# Altium PCB BlindController.PcbDoc
Units mil, origin at the board's own origin, x right, y up, seen from the top; angles counter-clockwise.
Board outline 6000 x 4000 mil, 2 copper layers (Top Layer, Bottom Layer); 65 components, 46 nets, 204 pads, 20 vias.
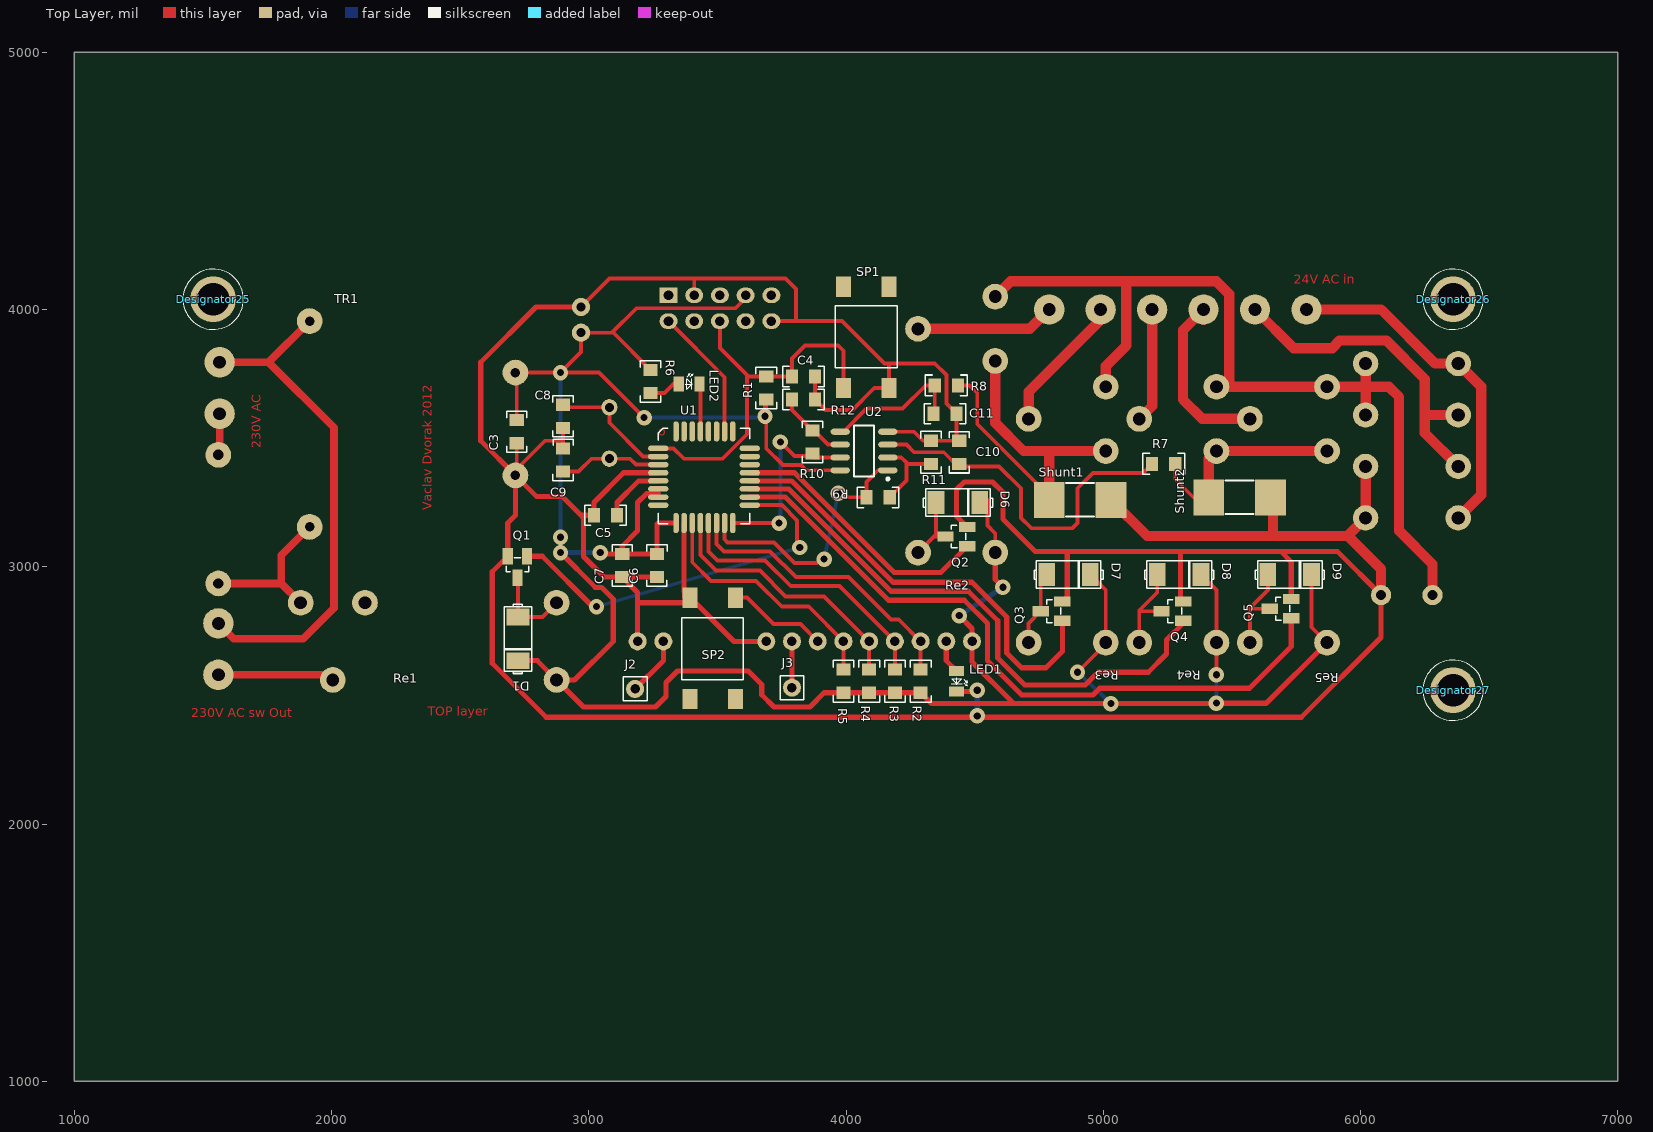
[diagram p0: Top Layer view]
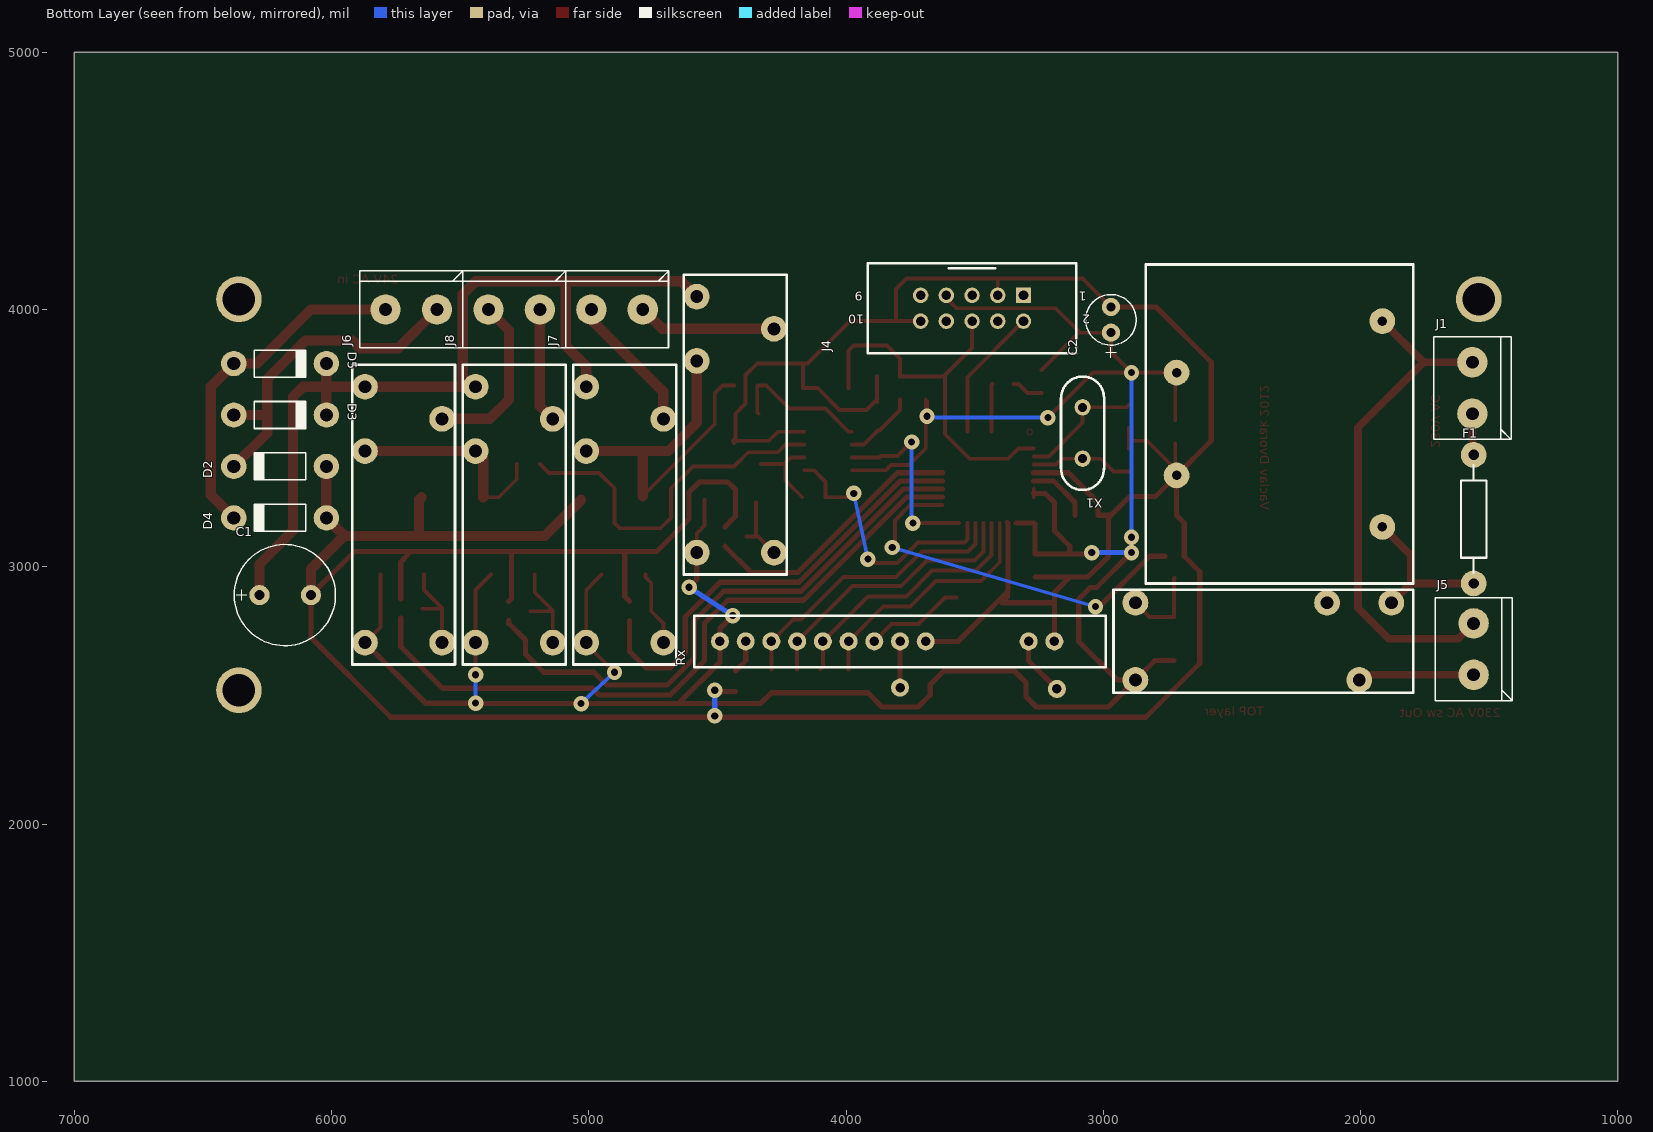
[diagram p1: Bottom Layer view, seen from below]

## Layer stack, top to bottom
Top Layer: signal copper 1.4
Dielectric: dielectric 12.6, FR-4, Dk 4.8
Bottom Layer: signal copper 1.4

## Board outline
1000,1000 7000,1000 7000,5000 1000,5000

## Design rules (kind name [scope] priority, off if disabled: settings)
Clearance [All] p1: gap=8
ComponentClearance [All] p1 off: gap=10 collisioncheckmode=3 verticalgap=10 showdistances=FALSE
PolygonConnect [All] p1: connectstyle=Relief reliefconductorwidth=10 reliefentries=4 polygonreliefangle="90 Angle"
RoutingVias [All] p1: holewidth=28 width=50 viastyle="Through Hole" minholewidth=28 minwidth=50 maxholewidth=28 maxwidth=50
SilkscreenOverComponentPads [All] p1: minsilkscreentomaskgap=10
SolderMaskExpansion [All] p1: expansion=4
Width [All] p1: maxlimit=40 minlimit=10 preferedwidth=15 minimp=50.000000 maximp=50.000000 favimp=50.000000
26 further rules are at their usual default settings.

## Components (designator, comment, footprint, x,y, rotation, side; value= is the part's Value field where it differs from the comment)
C1 "2.2mF/35 V" EL_10X13 6280,2890 r180 bottom
C2 "C_EL" EL_5x11 2970,3910 r90 bottom
C3 "C" C0805 2720,3480 r90 top
C4 "" C0805 3880,3740 r180 top
C5 "C" C0805 3020,3200 r0 top
C6 "C" C0805 3265,2960 r90 top
C7 "C" C0805 3130,2960 r90 top
C8 "C" C0805 2900,3540 r90 top
C9 "C" C0805 2900,3460 r270 top
C10 "C" C0805 4440,3490 r270 top
C11 "C" C0805 4430,3595 r180 top
D1 "D" SMA 2725,2755 r270 top
D2 "D" DO41 6020,3390 r0 bottom
D3 "D" DO41 6380,3590 r180 bottom
D4 "D" DO41 6020,3190 r0 bottom
D5 "D" DO41 6380,3790 r180 bottom
D6 "D" SMA 4400,3250 r0 top
D7 "D" SMA 4830,2970 r0 top
D8 "D" SMA 5260,2970 r0 top
D9 "D" SMA 5690,2970 r0 top
Designator25 "Comment" Sloupek 1540,4040 r0 top
Designator26 "Comment" Sloupek 6360,4040 r0 top
Designator27 "Comment" Sloupek 6360,2520 r0 top
F1 "Fuse" AXIAL-0.5L 1560,3185 r90 bottom
J1 "230V AC" ARK_2 1565,3595 r90 bottom
J2 "Antenna" PIN 3180,2525 r0 top
J3 "TP1" PIN 3790,2530 r0 top
J4 "ICC/SWIM (MLW10)" MLW10 3310,4055 r0 bottom
J5 "230V AC to Trans Primary" ARK_2 1560,2580 r90 bottom
J6 "24V AC Trans Sec." ARK_2 5590,4000 r0 bottom
J7 "Mot1 24V DC" ARK_2 4790,4000 r0 bottom
J8 "Mot2 24V DC" ARK_2 5190,4000 r0 bottom
LED1 "LED" LED_SMD 4430,2595 r270 top
LED2 "LED" LED_SMD 3350,3710 r0 top
Q1 "BSS138" SOT23 2760,3040 r180 top
Q2 "BSS138" SOT23 4470,3080 r90 top
Q3 "BSS138" SOT23 4840,2790 r90 top
Q4 "BSS138" SOT23 5310,2790 r90 top
Q5 "BSS138" SOT23 5730,2800 r90 top
R1 "" R0805 3690,3650 r90 top
R2 "R" R0805 4290,2510 r90 top
R3 "R" R0805 4190,2510 r90 top
R4 "R" R0805 4090,2510 r90 top
R5 "R" R0805 3990,2510 r90 top
R6 "R" R0805 3240,3765 r270 top
R7 "R" R0805 5280,3400 r180 top
R8 "R" R0805 4435,3705 r180 top
R9 "R" R0805 4080,3270 r0 top
R10 "R" R0805 3870,3440 r90 top
R11 "R" R0805 4330,3400 r90 top
R12 "R" R0805 3790,3650 r0 top
Re1 "SPDT" RELE_JS-K 1880,2860 r0 top
Re2 "SPDT" RELE_JS-K 4580,4050 r270 top
Re3 "SPDT" RELE_JS-K 5010,3700 r270 top
Re4 "SPDT" RELE_JS-K 5440,3700 r270 top
Re5 "SPDT" RELE_JS-K 5870,3700 r270 top
Rx "MX-4MHCS" RX-4MHCS 3190,2710 r0 bottom
Shunt1 "1R0" "R Shunt S-2" 4910,3260 r180 top
Shunt2 "1R0" "R Shunt S-2" 5530,3270 r180 top
SP1 "SP" DIP_PUSH_BUTTON 3990,3695 r90 top
SP2 "SP" DIP_PUSH_BUTTON 3570,2880 r270 top
TR1 "MYRRA 47152" MYRRA47000 1915,3155 r90 top
U1 "STM8AF61x6T" QFP32 3270,3460 r0 top
U2 "TS922" SO8_L 4070,3450 r180 top
X1 "" HC-49U 3080,3620 r270 bottom

## Footprints (in the part's own frame and the unit in brackets; to place one, negate y for a bottom-side part, rotate by r counter-clockwise, add the part's x,y. Pads: shape width x height; smd on the part's side, far side on the other; paste and mask are expansions set on the pad)
ARK_2 [mm]
  round 3 hole 1.27: 1(0,0) 2(5.08,0)
  silkscreen extent -2.54,-3.82 7.62,3.8
AXIAL-0.5L [mil] "Semiconductor Resistor; 2 Leads"
  round 100 hole 40: 1(-250,0) 2(250,0)
  silkscreen extent -210,-50 210,50
C0805 [mm]
  rect 1.2x1.4 smd: 1(0,0) 2(2.286,0)
  silkscreen extent -0.9,-1 3.19,1
DIP_PUSH_BUTTON [mm]
  rect 2x1.5 smd: 1(0,0) 2(0,-4.496) 3(10.008,-4.496) 4(10.008,0)
  silkscreen extent 2.01,-5.31 8.1,0.79
DO41 [mm]
  round 2.5 hole 1.3: 1(0,0) 2(9.144,0)
  silkscreen extent 2.03,-1.33 7.11,1.33
EL_5x11 [mm]
  round 1.8 hole 0.9: 1(0,0) 2(2.54,0)
  silkscreen extent -2.48,-2.5 3.77,2.5
EL_10X13 [mm]
  round 2 hole 1: 1(0,0) 2(5.08,0)
  silkscreen extent -2.5,-5 7.5,5
HC-49U [mil]
  round 63 hole 35: 1(0,0) 2(200,0)
  silkscreen extent -119,-84 321,83
LED_SMD [mm]
  rect 1x1.5 smd: 1(0,0) 2(2.032,0)
  silkscreen extent 0.66,-0.51 1.45,1.05
MLW10 [mil] "Header, STRT 10WAY - MLW10"
  rect 60x60 / inner rect 60x60 / far side rect 70x60 hole 37: 1(0,0)
  round 60 / inner round 60 / far side oval 70x60 hole 37: 2(0,100) 3(100,0) 4(100,100) 5(200,0) 6(200,100) 7(300,0) 8(300,100) 9(400,0) 10(400,100)
  silkscreen extent -205,-125 605,225
MYRRA47000 [mil] "AC/DC converter Myrra 47000 series"
  round 100 hole 37: 1(0,0) 5(800,0) 7(600,-800) 9(200,-800)
PIN [mil]
  round 70 hole 37: 1(0,0)
  silkscreen extent -46,-46 46,46
QFP32 [mm]
  oval 2x0.55 smd: 1(0,0) 2(0,-0.8) 3(0,-1.6) 4(0,-2.4) 5(0,-3.2) 6(0,-4) 7(0,-4.8) 8(0,-5.6) 17(9.04,-5.6) 18(9.04,-4.8) 19(9.04,-4) 20(9.04,-3.2) 21(9.04,-2.4) 22(9.04,-1.6) 23(9.04,-0.8) 24(9.04,0)
  oval 0.55x2 smd: 9(1.76,-7.36) 10(2.56,-7.36) 11(3.36,-7.36) 12(4.16,-7.36) 13(4.96,-7.36) 14(5.76,-7.36) 15(6.56,-7.36) 16(7.36,-7.36) 25(7.36,1.68) 26(6.56,1.68) 27(5.76,1.68) 28(4.96,1.68) 29(4.16,1.68) 30(3.36,1.68) 31(2.56,1.68) 32(1.76,1.68)
  silkscreen extent 0,-7.44 9.04,2
R0805 [mm]
  rect 1.2x1.4 smd: 1(0,0) 2(2.286,0)
  silkscreen extent -0.93,-1.03 3.2,1.02
"R Shunt S-2" [mil] "Shunt Resistor; Body 6.3 x 3.2 mm (LxW typ)"
  rect 120x140 smd: 1(-120,0) 2(120,0)
  silkscreen extent -55,-65 55,65
RELE_JS-K [mil] "Rele - K contacts configuration"
  round 100 hole 50: 1(0,0) 2(250,0) 3(995,0) 4(995,-300) 5(125,-300)
RX-4MHCS [mil] "433MHz 4 channels receiver"
  round 70 hole 37: 2(0,0) 3(100,0) 7(500,0) 8(600,0) 9(700,0) 10(800,0) 11(900,0) 12(1000,0) 13(1100,0) 14(1200,0) 15(1300,0)
  silkscreen extent -200,-100 1400,100
Sloupek [mm]
  round 4.5 hole 3.2: 1(0,0)
  silkscreen extent -2.98,-2.98 2.98,2.98
SMA [mil]
  rect 65x90 smd: 1(-50,0) 2(120,0)
  silkscreen extent -99,-53 170,53
SO8_L [mm] "SOIC, 8-Leads, Body 4.9x3.9mm, Pitch 1.27mm, IPC High Density"
  oval 1.9x0.6 smd: 1(-2.35,1.905) 2(-2.35,0.635) 3(-2.35,-0.635) 4(-2.35,-1.905) 5(2.35,-1.905) 6(2.35,-0.635) 7(2.35,0.635) 8(2.35,1.905)
  silkscreen extent -2.48,-2.5 1,2.88, body extent -1.95,-2.45 1.95,2.45, height 1.75
SOT23 [mm]
  rect 1x1.6 smd: 1(0,-0.025) 2(1.905,-0.025) 3(0.94,2.108)
  silkscreen extent -0.18,0.13 2.06,1.52

## Part data
C1: library part C_EL_1
C4: library part C
J1 J5 J6 J7 J8: library part CON_2
J2 J3: library part PIN
J4: library part CON_10
Q1 Q2 Q3 Q4 Q5: "N-Channel Enhancement Mode Vertical DMOS FET"
R1 Shunt1 Shunt2: library part R
Re1 Re2 Re3 Re4 Re5: library part Rele_SPDT, "rele SPDT"
Rx: library part RX-4MHCS
TR1: library part MYRRA_AC_DC, "AC/DC  IN:85..260 V AC(DC), OUT: 5V/900mA DC"
U2: library part TS912ID, "Rail-to-Rail CMOS Dual Operational Amplifier"
X1: library part XTALL

## Via types
v1: diameter 60, hole 28, Top Layer to Bottom Layer, 20 vias

## Nets (pads, with @x,y where several pads share a name; then routed paths per layer and width w, separated by ;. In a path a pad name is that pad's centre, name@x,y a point inside that pad or via, vN(x,y) a via of type N, cw(c..) or ccw(c..) an arc to the next point about the centre after c; other vN are vias at no path point)
5V: C2.1 C3.2 C6.2 C7.2 D1.2 D6.2 D7.2 D8.2 D9.2 J4.7 R1.1 R2.1 R3.1 R4.1 R5.1 R6.1 Re1.4 Re2.3 Re3.3 Re4.3 Re5.3 Rx.15 TR1.7 U1.6 U1.7 U1.9 U2.8 | length 11434.2
  Top Layer w15: TR1.7 TR1.7@2720,3755 ; C3.2 TR1.7@2720,3755 ; v1(2890,3055) v1(2890,3115) ; v1(3215,3580) 3040,3755 v1(2890,3755) ; R6.1 3095,3910 3090,3910 ; U1.7 3270,3285 U1.6 ; J4.7 3610,4045 3570,4005 3185,4005 3090,3910 ; v1(3685,3585) 3685,3645 R1.1 3690,3460 3755,3395 3825,3395 3845,3375 U2.8 ; D6.2@4550,3260 4550,3160 4580,3130 Re2.3 ; v1(4900,2590) 5010,2700 Re3.3 5010,2910 D7.2 ; D8.2 5440,2910 Re4.3 v1(5440,2580) v1@5440,2570 ; D9.2 5810,2765 Re5.3 ; TR1.7@2720,3755 v1(2890,3755) ; v1(2890,3755) 2970,3835 C2.1 3090,3910
  Top Layer w20: D1.2 2800,2635 Re1.4 ; v1(2890,3055) 3025,2920 3050,2920 3095,2875 3095,2710 2945,2560 Re1.4 ; v1(3045,3055) 3050,3050 C7.2 ; 3270,3285 3225,3285 3190,3250 3190,3140 3130,3080 C7.2 ; U1.9 3270,3170.24 3265,3165.24 C6.2 C7.2 ; v1(4440,2810) 4490,2760 Rx.15 4490,2630 4650,2470 4648,2468 ; Re2.3 4580,2950 v1(4610,2920) ; v1(5440,2470) 5635,2470 ; Re5.3 5635,2470 ; Re1.4 2980,2455 3259.1,2455 3300,2495.9 3300,2550 3345,2595 3620,2595 3672.5,2542.5 3672.5,2502.5 3720,2455 3860,2455 3915,2510 R5.1 R4.1 R3.1 R2.1 4332,2468 4648,2468 ; 4648,2468 v1(5030,2468) 5633,2468 5635,2470
  Bottom Layer w15: v1(2890,3115) v1(2890,3755) ; v1(3215,3580) 3680,3580 v1(3685,3585) ; v1(4900,2590) 5027.87,2470 v1(5030,2468) ; v1(5440,2470) v1(5440,2580)
  Bottom Layer w20: v1(2890,3055) v1(3045,3055) ; v1(4440,2810) v1(4610,2920)
C_SENSE1: R9.1 U1.15 U2.1 | length 1052.7
  Top Layer w15: U1.15 3528.27,3106.73 3540,3095 3720,3095 3800,3015 3885,3015 3900,3030 v1(3915,3030) v1@3915,3050 ; v1(3970,3285) 3985,3270 R9.1 4080,3330 4125,3375 U2.1
  Bottom Layer w15: v1(3915,3030) 3923.25,3068.25 v1(3970,3285)
C_SENSE2: R10.1 U1.16 U2.7 | length 754.7
  Top Layer w15: U1.16 3739.76,3170.24 v1(3740,3170) ; v1(3745,3485) 3800,3430 3865,3430 3870,3425 U2.7
  Bottom Layer w15: v1(3740,3170) 3745,3175 v1(3745,3485)
CH1: R5.2 Rx.10 U1.11 | length 977.7
  Top Layer w15: U1.11 3402.28,3017.72 3475,2945 3650,2945 3750,2845 3855,2845 Rx.10 R5.2
CH2: R4.2 Rx.11 U1.12 | length 1033.6
  Top Layer w15: U1.12 3433.78,3046.22 3495,2985 3665,2985 3765,2885 3915,2885 Rx.11 4090,2610 R4.2@4100,2600
CH3: R3.2 Rx.12 U1.13 | length 1090.1
  Top Layer w15: U1.13 3465.28,3059.72 3500,3025 3685,3025 3785,2925 3975,2925 Rx.12 R3.2
CH4: R2.2 Rx.13 U1.14 | length 1141.9
  Top Layer w15: U1.14 3496.77,3088.23 3525,3060 3705,3060 3805,2960 4010,2960 4175,2795 4205,2795 Rx.13 R2.2
GND: C1.2 C2.2 C3.1 C4.1 C5.1 C6.1 C7.1 C8.1 C9.1 C10.1 C11.1 D2.1 D4.1 J4.3 J4.10 LED1.2 Q1.2 Q2.2 Q3.2 Q4.2 Q5.2 R11.2 R12.2 Rx.2 Rx.7 Shunt1.1 Shunt2.1 SP1.2 SP2.2 TR1.9 U1.4 U1.10 U2.4 | length 15955.4
  Top Layer w15: TR1.9@2720,3350 TR1.9@2720,3380 ; C3.1 TR1.9@2720,3380 ; C9.1 2900,3490 ; C8.1 2900,3490 ; C2.2 3080,4120 3410,4120 ; SP2.2@3370.79,2904.21 3370.79,2882.21 SP2.2@3393,2860 ; U1.10 U1.10@3374.49,3173.94 ; J4.3 3410,4120 ; J4.10 3805,3955 ; R12.2@3880,3640 R12.2 ; C4.1 R12.2 ; U2.4 4265,3525 4300,3490 R11.2 4425,3490 C10.1@4435,3480 ; C10.1 4430,3500 C11.1 4390,3635 4390,3745 4345,3790 4170,3790 ; TR1.9@2720,3380 2830,3490 2900,3490 ; 3410,4120 3765,4120 3805,4080 3805,3955 ; 3805,3955 3985,3955 4150,3790 4170,3790 ; R12.2 3920,3610 4025,3610 4110,3695 SP1.2 4167,3787 4170,3790
  Top Layer w20: C2.2 2795,4010 2580,3795 2580,3490 TR1.9 ; Rx.2 3190,2860 ; C6.1 C7.1 ; U1.4 3135.51,3365.51 3020,3250 C5.1 2970,3200 ; U1.10 3370.79,2904.21 3565,2710 Rx.7 ; SP2.2@3393,2860 3190,2860 ; LED1.2 4505,2515 4510,2510 v1(4510,2520) ; Q2.2 4430,3196 4430,3300 4460,3330 4570,3330 4610,3290 4610,3185 4735,3060 4860,3060 ; v1(4510,2420) v1@4515,2415 ; Q3.2 Q3.2@4860,2884 ; 4860,2886 4860,3060 ; Q4.2 5300,2876 5300,3060 ; Q5.2 5731,3019 5690,3060 ; TR1.9 2720,3350 2797.5,3272.5 2897.5,3272.5 2970,3200 ; TR1.9 2715,3200 2685,3170 Q1.2 2625,2981 2625,2625 2835,2415 v1@4515,2415 ; 2970,3200 2980,3190 2980,3040 3060,2960 C7.1 ; C7.1 3190,2900 3190,2860 ; v1@4515,2415 5770,2415 6080,2725 C1.2 5910,3060 5690,3060 ; 4860,3060 5300,3060 ; 5300,3060 5690,3060
  Top Layer w40: Shunt1.1 5170,3120 5660,3120 ; Shunt2.1 5660,3260 5660,3120 ; D2.1 D4.1 5950,3120 ; C1.2 6080,2990 5950,3120 ; 5660,3120 5950,3120
  Bottom Layer w20: v1(4510,2420) v1(4510,2520)
NetC1_1: C1.1 D3.2 D5.2 Re2.1 Re3.1 Re4.1 Re5.1 | length 3503.3
  Top Layer w40: Re2.1 4640,4110 5440,4110 5490,4060 5490,3710 5500,3700 ; Re3.1 5010,3780 5090,3860 5090,4100 ; Re4.1 5500,3700 ; D3.2 6020,3700 ; D5.2 6020,3700 ; C1.1 6280,3010 6150,3140 6150,3660 6110,3700 6020,3700 ; 5500,3700 Re5.1 6020,3700
NetC5_2: C5.2 U1.5 | length 244.8
  Top Layer w20: C5.2 3110,3250 3194.02,3334.02 U1.5
NetC8_2: C8.2 U1.2 X1.1 | length 488.6
  Top Layer w15: C8.2 2910,3620 X1.1 3080,3560 3211.5,3428.5 U1.2
NetC9_2: C9.2 U1.3 X1.2 | length 400.2
  Top Layer w15: C9.2 2960,3370 3010,3420 X1.2 3160,3420 3182.99,3397.01 U1.3
NetC10_2: C10.2 R7.2 U2.3 | length 1412.1
  Top Layer w15: U2.3 4235,3475 4265,3445 4380,3445 4435,3390 4595,3390 4680,3305 4680,3190 4720,3150 4880,3150 4900,3170 4900,3305 4960,3365 5155,3365 R7.2
NetC11_2: C11.2 R8.2 U2.5 | length 554.1
  Top Layer w15: U2.5 3990,3525 4080,3615 4220,3615 4310,3705 R8.2 4345,3600 C11.2
NetD1_1: D1.1 Q1.3 Re1.3 | length 325.6
  Top Layer w15: Q1.3 2725,2955 D1.1 2820,2805 Re1.3
NetD2_2: D2.2 D3.1 J6.1 | length 1334.7
  Top Layer w40: J6.1@5590,3990 J6.1 5740,3850 5890,3850 5920,3880 6100,3880 6250,3730 6250,3600 ; D2.2 6250,3520 6250,3600 ; D3.1 6260,3590 6250,3600
NetD4_2: D4.2 D5.1 J6.2 | length 1351.5
  Top Layer w40: J6.2 6080,4000 6290,3790 D5.1 6470,3700 6470,3280 D4.2
NetD6_1: D6.1 Q2.3 Re2.4 | length 269
  Top Layer w15: Re2.4 4342,3117 ; D6.1 4350,3125 4342,3117 ; Q2.3 4342,3117
NetD7_1: D7.1 Q3.3 Re3.4 | length 294
  Top Layer w15: Re3.4 4710,2780 Q3.3 4757,2937 4780,2960 D7.1
NetD8_1: D8.1 Q4.3 Re4.4 | length 382.2
  Top Layer w15: Re4.4 5140,2830 ; D8.1 5210,2900 5140,2830 ; Q4.3 5143,2827 5140,2830
NetD9_1: D9.1 Q5.3 Re5.4 | length 372.2
  Top Layer w15: Re5.4 5570,2840 ; D9.1 5640,2910 5570,2840 ; Q5.3 5573,2837 5570,2840
NetF1_1: F1.1 Re1.1 TR1.1 | length 616.6
  Top Layer w30: F1.1 1805,2935 ; Re1.1 1805,2935 ; TR1.1 1805,3045 1805,2935
NetF1_2: F1.2 J1.1 | length 162.1
  Top Layer w30: F1.2 1565,3440 J1.1
NetJ1_2: J1.2 J5.2 TR1.5 | length 2001.5
  Top Layer w30: J5.2 1620,2720 1890,2720 2010,2840 2010,3540 1755,3795 ; J1.2 1755,3795 ; TR1.5 1755,3795
NetJ2_1: J2.1 Rx.3 | length 230.6
  Top Layer w20: J2.1 3290,2635 Rx.3
NetJ3_1: J3.1 Rx.8 | length 180
  Top Layer w20: J3.1 Rx.8
NetJ5_1: J5.1 Re1.5 | length 453.3
  Top Layer w30: J5.1 1985,2580 Re1.5
NetJ7_1: J7.1 Re2.5 | length 541.1
  Top Layer w40: Re2.5 4715,3925 J7.1
NetJ7_2: J7.2 Re3.5 | length 541
  Top Layer w40: Re3.5 4710,3680 4990,3960 J7.2
NetJ8_1: J8.1 Re4.5 | length 445.7
  Top Layer w40: Re4.5 5190,3625 J8.1
NetJ8_2: J8.2 Re5.5 | length 714.2
  Top Layer w40: J8.2@5390,3960 J8.2 5310,3920 5310,3650 5385,3575 Re5.5
NetLED1_1: LED1.1 Rx.14 | length 131.6
  Top Layer w20: Rx.14 4390,2635 LED1.1
NetLED2_1: LED2.1 R6.2 | length 124.5
  Top Layer w15: R6.2 3295,3675 3330,3710 LED2.1
NetLED2_2: LED2.2 U1.29 | length 185.4
  Top Layer w15: LED2.2 3433.78,3706.22 U1.29
NetQ1_1: Q1.1 U1.17 | length 1491.9
  Top Layer w15: U1.17 3750.47,3239.53 3810,3180 3810,3085 v1(3820,3075)
  Top Layer w20: Q1.1 2819,3041 3015,2845 v1(3030,2845)
  Bottom Layer w15: v1(3030,2845) 3756.52,3056.52 v1(3820,3075)
NetR9_2: R9.2 R11.1 U2.2 | length 339.8
  Top Layer w15: U2.2 4215,3425 4235,3405 ; R9.2 4235,3335 4235,3405 ; R11.1 4240,3400 4235,3405
NetR10_2: R10.2 R12.1 U2.6 | length 283.4
  Top Layer w15: R12.1 3790,3610 R10.2 3875,3530 3930,3475 U2.6
NetRx_9: Rx.9 SP2.1 | length 390.4
  Top Layer w15: SP2.1 3615,2880 3717.5,2777.5 3822.5,2777.5 Rx.9
REL2_CTRL: Q2.1 U1.21 | length 1048.3
  Top Layer w20: U1.21 3799.49,3365.51 4187.5,2977.5 4368.5,2977.5 Q2.1
REL3_CTRL: Q3.1 U1.20 | length 1743.3
  Top Layer w20: U1.20 3788.56,3334.02 4182.57,2940 4490,2940 4625,2805 4625,2665 4682.5,2607.5 4777.5,2607.5 4841,2671 Q3.1
REL4_CTRL: Q4.1 U1.19 | length 2226.9
  Top Layer w20: U1.19 3777.63,3302.52 4175.15,2905 4475,2905 4590,2790 4590,2645 4695,2540 4930,2540 4980,2590 5175,2590 5246.37,2661.37 5246.37,2715.37 5311,2780 Q4.1
REL5_CTRL: Q5.1 U1.18 | length 2696.9
  Top Layer w20: U1.18 3763.98,3271.02 4165,2870 4460,2870 4550,2780 4550,2635 4683.5,2501.5 4960,2501.5 4986.5,2528 5569,2528 5731,2690 Q5.1
RST: C4.2 J4.6 R1.2 SP1.1 U1.1 | length 1505.5
  Top Layer w15: U1.1 3330,3460 3370,3420 3520,3420 3615,3515 3615,3745 ; J4.6 3510,3850 3615,3745 ; SP1.1 3990,3840 3970,3860 3840,3860 3790,3810 C4.2 R1.2 3620,3740 3615,3745
S1: R8.1 Re2.2 Re3.2 Shunt1.2 | length 1509
  Top Layer w15: R8.1 4480,3705 4510,3675 4510,3555 4790,3275 Shunt1.2
  Top Layer w40: Re2.2 4580,3560 4690,3450 4790,3450 ; Shunt1.2@4790,3275 4790,3450 ; Re3.2 4790,3450
S2: R7.1 Re4.2 Re5.2 Shunt2.2 | length 855.6
  Top Layer w15: R7.1 5280,3340 5350,3270 Shunt2.2
  Top Layer w40: Shunt2.2 5410,3420 Re4.2 ; Re4.2@5450,3460 Re4.2 ; Re5.2 Re4.2
SWIM: J4.2 U1.26 | length 519.3
  Top Layer w15: J4.2 3528.27,3736.73 U1.26
pads on no net: Designator25.1 Designator26.1 Designator27.1 J4.1 J4.4 J4.5 J4.8 J4.9 Re1.2 SP1.3 SP1.4 SP2.3 SP2.4 U1.8 U1.22 U1.23 U1.24 U1.25 U1.27 U1.28 U1.30 U1.31 U1.32

## Other copper
Top Layer:
  text "24V AC in" at 5740,4100 h35
  text "o" at 3270,3510 h35
  text "230V AC" at 1725,3460 h35 r90
  text "Vaclav Dvorak 2012" at 2390,3220 h35 r90
  text "TOP layer" at 2375,2420 h35
  text "230V AC sw Out" at 1455,2415 h35

## Silkscreen, mask and mechanical layers (free items; w line width, h text height)
Mechanical 1:
  lines w10: 1400,2375 1400,4180 6500,4180 6500,2375 1400,2375

## Dimensions
1400,2375 to 6500,2375 on Mechanical 1
1400,2375 to 1400,4180 on Mechanical 1

## Text inside footprints (layer, text, board x,y; h text height)
J4: Bottom Overlay "1" at 3065,4070 h35 r180; Bottom Overlay "2" at 3050,3980 h35 r180; Bottom Overlay "9" at 3935,4070 h35 r180; Bottom Overlay "10" at 3930,3980 h35 r180